# Altium PCB PCB.PcbDoc (part 2 of 3)
Units mm, origin at the board's own origin, x right, y up, seen from the top; angles counter-clockwise.
Board outline 200 x 125 mm, 2 copper layers (Top Layer, Bottom Layer), stack 1.56 mm thick; 156 components, 82 nets, 479 pads, 136 vias.
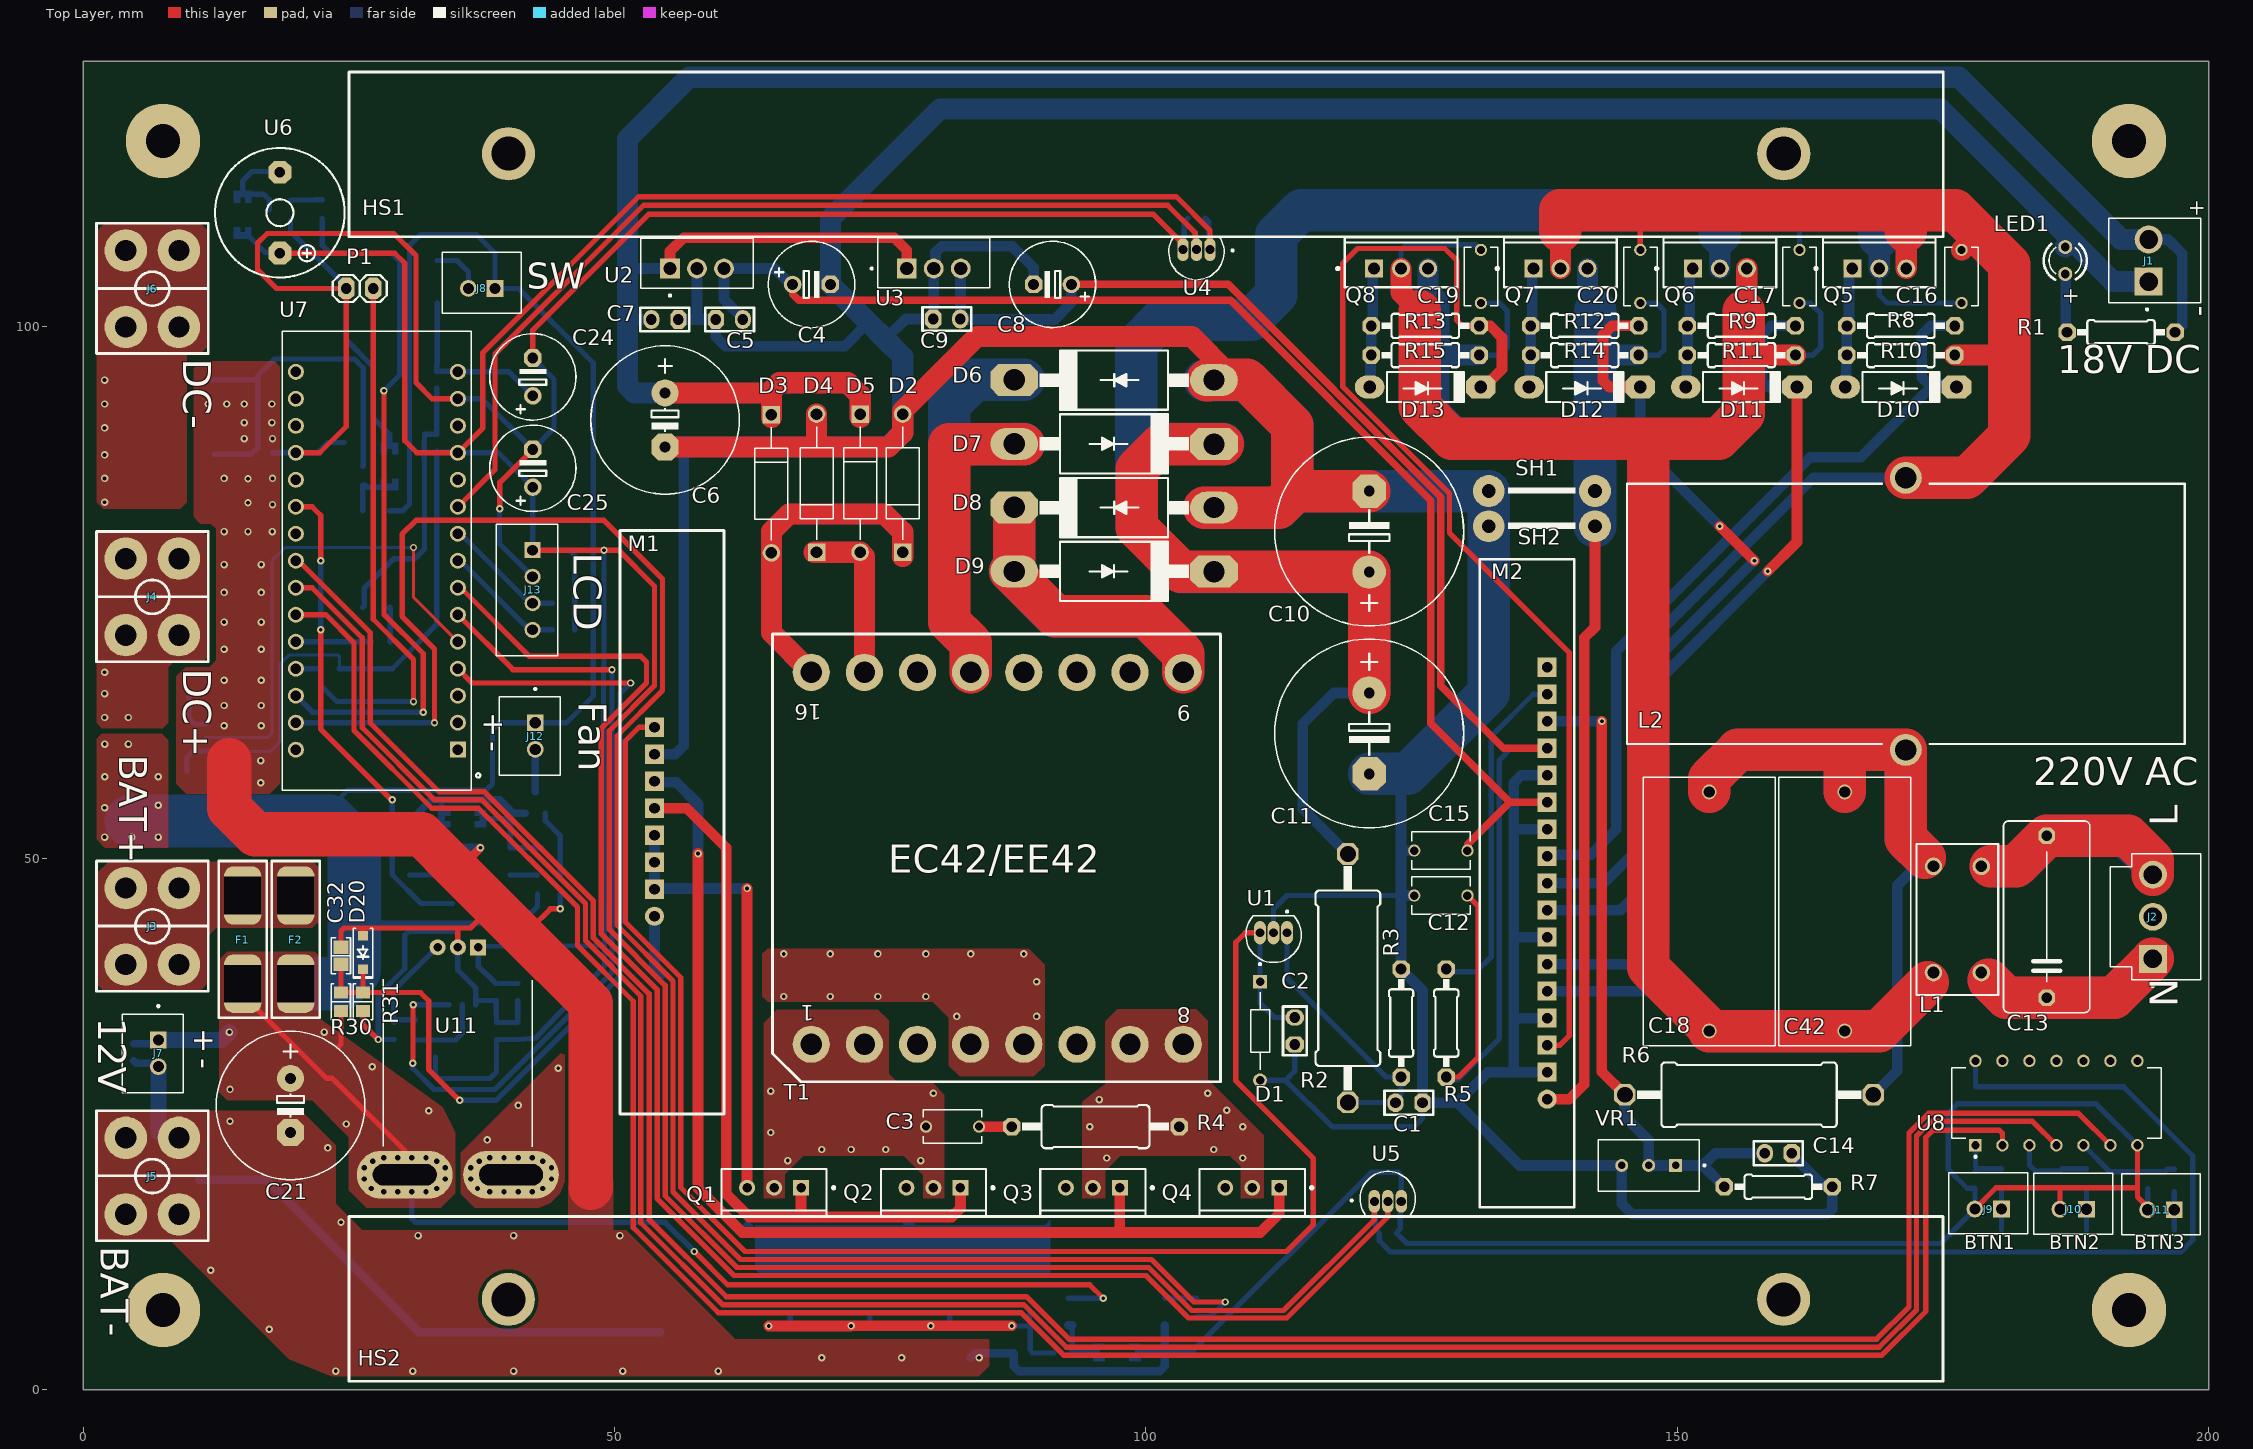
[diagram p0: Top Layer view]

## Part data (continued)
R22 R29: library part RT0805DRD0710KL, "RES SMD 10K OHM 0.5% 1/8W 0805", Device Package="0805 (2012 Metric)", Manufacturer=Yageo, Operating Temperature="-55°C ~ 155°C", Power (Watts)="0.125W, 1/8W", Supplier Device Package=0805, Supplier Part Number 1=311-2699-1-ND, Temperature Coefficient=±25ppm/°C, Tolerance=±0.5%, ComponentLink1Description=Datasheet, ComponentLink1URL=https://www.yageo.com/upload/media/product/productsearch/datasheet/rchip/PYu-RT_1-to-0.01_RoHS_L_11.pdf, ComponentLink2Description="DigiKey Link", ComponentLink2URL=https://www.digikey.com/en/products/detail/yageo/RT0805DRD0710KL/1077814, Composition="Thin Film", Height - Seated (Max)="0.024\" (0.60mm)", id=58, LastUpdated=2023-01-02T20:44:51.957, Lifecycle Status=Active, Minimum Order=1, Number Of Terminations=2, Package / Case="0805 (2012 Metric)", Packaging=TapeAndReel, PartId=27797, Part Number=RT0805DRD0710KL, Part Status=Active, Price=0.03, Resistance="10 kOhms", Series=RT, Size / Dimension="0.079\" L x 0.049\" W (2.00mm x 1.25mm)", Supplier 1=DigiKey
R30: library part RT0805BRD0730KL, "RES SMD 30K OHM 0.1% 1/8W 0805", Device Package="0805 (2012 Metric)", Manufacturer=Yageo, Operating Temperature="-55°C ~ 155°C", Power (Watts)="0.125W, 1/8W", Supplier Device Package=0805, Supplier Part Number 1=YAG1865CT-ND, Temperature Coefficient=±25ppm/°C, Tolerance=±0.1%, ComponentLink1Description=Datasheet, ComponentLink1URL=https://www.yageo.com/upload/media/product/productsearch/datasheet/rchip/PYu-RT_1-to-0.01_RoHS_L_11.pdf, ComponentLink2Description="DigiKey Link", ComponentLink2URL=https://www.digikey.com/en/products/detail/yageo/RT0805BRD0730KL/1075808, Composition="Thin Film", Height - Seated (Max)="0.024\" (0.60mm)", id=4497, LastUpdated=2023-01-02T20:44:13.950, Lifecycle Status=Active, Minimum Order=1, Number Of Terminations=2, Package / Case="0805 (2012 Metric)", Packaging=TapeAndReel, PartId=36699, Part Number=RT0805BRD0730KL, Part Status=Active, Price=0.04, Resistance="30 kOhms", Series=RT, Size / Dimension="0.079\" L x 0.049\" W (2.00mm x 1.25mm)", Supplier 1=DigiKey
R31: library part RT0805BRD077K5L, "RES SMD 7.5K OHM 0.1% 1/8W 0805", Device Package="0805 (2012 Metric)", Manufacturer=Yageo, Operating Temperature="-55°C ~ 155°C", Power (Watts)="0.125W, 1/8W", Supplier Device Package=0805, Supplier Part Number 1=YAG1974CT-ND, Temperature Coefficient=±25ppm/°C, Tolerance=±0.1%, ComponentLink1Description=Datasheet, ComponentLink1URL=https://www.yageo.com/upload/media/product/productsearch/datasheet/rchip/PYu-RT_1-to-0.01_RoHS_L_11.pdf, ComponentLink2Description="DigiKey Link", ComponentLink2URL=https://www.digikey.com/en/products/detail/yageo/RT0805BRD077K5L/1076048, Composition="Thin Film", Height - Seated (Max)="0.024\" (0.60mm)", id=2995, LastUpdated=2023-01-02T20:44:27.430, Lifecycle Status=Active, Minimum Order=1, Number Of Terminations=2, Package / Case="0805 (2012 Metric)", Packaging=TapeAndReel, PartId=33662, Part Number=RT0805BRD077K5L, Part Status=Active, Price=0.04, Resistance="7.5 kOhms", Series=RT, Size / Dimension="0.079\" L x 0.049\" W (2.00mm x 1.25mm)", Supplier 1=DigiKey
R32: library part RT0805DRD07120RL, "RES SMD 120 OHM 0.5% 1/8W 0805", Device Package="0805 (2012 Metric)", Manufacturer=Yageo, Operating Temperature="-55°C ~ 155°C", Power (Watts)="0.125W, 1/8W", Supplier Device Package=0805, Supplier Part Number 1=13-RT0805DRD07120RLCT-ND, Temperature Coefficient=±25ppm/°C, Tolerance=±0.5%, ComponentLink1Description=Datasheet, ComponentLink1URL=https://www.yageo.com/upload/media/product/app/datasheet/rchip/pyu-rt_1-to-0.01_rohs_l.pdf, ComponentLink2Description="DigiKey Link", ComponentLink2URL=https://www.digikey.com/en/products/detail/yageo/RT0805DRD07120RL/1077835, Composition="Thin Film", Height - Seated (Max)="0.024\" (0.60mm)", id=19472, LastUpdated=2024-07-25T09:20:02.283, Lifecycle Status=Active, Minimum Order=1, Number Of Terminations=2, Package / Case="0805 (2012 Metric)", Packaging=TapeAndReel, PartId=88052, Part Number=RT0805DRD07120RL, Price=0.02, Resistance="120 Ohms", Series=RT, Size / Dimension="0.079\" L x 0.049\" W (2.00mm x 1.25mm)", Supplier 1=DigiKey
SH1 SH2: library part "Wire Shunt", "Constantan resistance sampling resistor 20mR. 1 mm dia, 10 mm leg"
T1: library part EC42-20, "Dual 12V To 0-220V-380V 18V 800W EC42-20 Horizontal. 43x43x15mm (L*W*H). 15KHz-50KHz", Input Voltage=12V, Insulation Test Voltage="3600V (AC)", Operating Temperature Max=125°C, Operating Temperature Min=-40°C, Output Current=2A, Output Voltage="18V, 220V, 380V", Switching Frequency=15-50kHz, Case/Size Code=EC42/EE42, Category="Transformers For AC-AC Converter", ComponentLink1Description="Website Link", ComponentLink1URL=https://www.we-online.com/redexpert/article/750310660?ad, ComponentLink2Description="Datasheet Link", ComponentLink2URL=https://www.we-online.com/redexpert/spec/750310660?ad, Mount="Through Hole", Packaging=Tray
U1: "Pwr Sply Func, Voltage Reference, Shunt, TO-92, VS 36V, IS 1 to 100mA, PD 0.7W", Package="TO-92-3 ON Semiconductor", Check_prices=https://www.snapeda.com/parts/TL431ILPG/Onsemi/view-part/?ref=eda, MF="ON Semiconductor", MP=TL431ILPG, SnapEDA_Link=https://www.snapeda.com/parts/TL431ILPG/Onsemi/view-part/?ref=snap
U2: library part LM7812CT/NOPB, "1.5-A, 30-V, linear voltage regulator", Package="TO-220-3 Texas Instruments", Check_prices=https://www.snapeda.com/parts/LM7812CT/NOPB/Texas+Instruments/view-part/?ref=eda, MF="Texas Instruments", MP=LM7812CT/NOPB, SnapEDA_Link=https://www.snapeda.com/parts/LM7812CT/NOPB/Texas+Instruments/view-part/?ref=snap
U3: library part LM7805CT/NOPB, "Linear Voltage Regulator IC Positive Fixed 1 Output 1.5A TO-220-3", Package="TO-220-3 ON Semiconductor", Availability="In Stock", Check_prices=https://www.snapeda.com/parts/LM7805CT/Onsemi/view-part/?ref=eda, MF="ON Semiconductor", MP=LM7805CT, Price=None, Purchase-URL=https://pricing.snapeda.com/search/part/LM7805CT/?ref=eda, SnapEDA_Link=https://www.snapeda.com/parts/LM7805CT/Onsemi/view-part/?ref=snap
U4 U5: "TEMP SENSOR, Â± 0.4Â°C; IC Output Type:Voltage; Sensing Accuracy Range:Â± 0.4Â°C; Sensing Temperature Min:+2Â°C; Sensing Temperature Max:+100Â°C; Sensor Case Style:TO-92; No. of Pins:3Pins; Supply Voltage Min:4V; Supply Voltage Max:30V; Product Range:LM35", Package="TO-92 Texas Instruments", Check_prices=https://www.snapeda.com/parts/LM35DZNOPB/Texas+Instruments/view-part/?ref=eda, MF="Texas Instruments", MP=LM35DZNOPB, SnapEDA_Link=https://www.snapeda.com/parts/LM35DZNOPB/Texas+Instruments/view-part/?ref=snap
U6: library part Buzzer, "5-12v small buzzer (12mm)", ASiD Part Number="Buzzer small-AS"
U7: library part ARDUINO_NANO_A000005, "ATSAMD21G18A Arduino Nano 33 IoT series ARMÂ® CortexÂ®-M0+ MCU 32-Bit Embedded Evaluation Board", Package="Non-Standard Arduino", Check_prices=https://www.snapeda.com/parts/ARDUINO%20NANO%20A000005/Arduino/view-part/?ref=eda, MF=Arduino, MP="ARDUINO NANO A000005", SnapEDA_Link=https://www.snapeda.com/parts/ARDUINO%20NANO%20A000005/Arduino/view-part/?ref=snap
U8: "6-ch, 2-V to 6-V inverters with Schmitt-Trigger inputs", Package="PDIP-14 Texas Instruments", Check_prices=https://www.snapeda.com/parts/CD74HC14E/Texas+Instruments/view-part/?ref=eda, MF="Texas Instruments", MP=CD74HC14E, SnapEDA_Link=https://www.snapeda.com/parts/CD74HC14E/Texas+Instruments/view-part/?ref=snap
U9: "Dual, Low-Noise, Rail-To-Rail Operational Amplifier 8-SOIC -40 to 125", Package="SOIC-8 Texas Instruments", Check_prices=https://www.snapeda.com/parts/TLC2272QDR/Texas+Instruments/view-part/?ref=eda, MF="Texas Instruments", MP=TLC2272QDR, SnapEDA_Link=https://www.snapeda.com/parts/TLC2272QDR/Texas+Instruments/view-part/?ref=snap
U10: "Current Sensor 30A 1 Channel Hall Effect, Open Loop Bidirectional 8-SOIC (0.154, 3.90mm Width)", Package="SOIC-8 Allegro MicroSystems LLC", Availability="In Stock", Check_prices=https://www.snapeda.com/parts/ACS712ELCTR-30A-T/Allegro+Industries/view-part/?ref=eda, MF=Allegro, MP=ACS712ELCTR-30A-T, Price=None, Purchase-URL=https://pricing.snapeda.com/search/part/ACS712ELCTR-30A-T/?ref=eda, SnapEDA_Link=https://www.snapeda.com/parts/ACS712ELCTR-30A-T/Allegro+Industries/view-part/?ref=snap
U11: "Current Sensor 150A 1 Channel Hall Effect, Open Loop Unidirectional 5-CB Formed Leads, PFF", Package="5-CB-5 Allegro MicroSystems LLC", Check_prices=https://www.snapeda.com/parts/ACS758/Allegro/view-part/?ref=eda, MF="Allegro MicroSystems", MP=ACS758, SnapEDA_Link=https://www.snapeda.com/parts/ACS758/Allegro/view-part/?ref=snap
VR1: library part 3296W-1-502, "NON-RoHS, 3/8 Sq, Thru-Hole, TRIMMER, 5 Kohms, Cermet, 25 Turns, Pwr-Rtg 0.5W", Package="NON STANDARD-3 Bourns", Check_prices=https://www.snapeda.com/parts/3296W-1-502/Bourns/view-part/?ref=eda, MF=Bourns, MP=3296W-1-502, SnapEDA_Link=https://www.snapeda.com/parts/3296W-1-502/Bourns/view-part/?ref=snap

## Free pads (board coordinates)
  round 7 hole 3.2: 9(7.5,7.5) 9(7.5,117.5) 9(192.5,7.5) 9(192.5,117.5)

## Via types
v1: diameter 0.7, hole 0.35, Top Layer to Bottom Layer, 78 vias
v2: diameter 0.7, hole 0.35, Top Layer to Bottom Layer, tented both sides, 55 vias
v3: diameter 0.7, hole 0.35, Top Layer to Bottom Layer, tented top, 3 vias

## Nets (pads, with @x,y where several pads share a name; then routed paths per layer and width w, separated by ;. In a path a pad name is that pad's centre, name@x,y a point inside that pad or via, vN(x,y) a via of type N, cw(c..) or ccw(c..) an arc to the next point about the centre after c; other vN are vias at no path point)
18VAC+: D2.C D3.A T1.16 | length 61.7
  Top Layer w2: T1.16@68.5,67.5 64.75,71.25 D3.A@64.75,78.75 64.75,80.75 66.4,82.4 75.4,82.4 77.1,80.7 D2.C@77.1,78.8 D2.C@77.1,78.4
  Bottom Layer w2: T1.16@68.5,67.5 64.75,71.25 D3.A@64.75,78.75 64.75,80.75 66.4,82.4 75.4,82.4 77.1,80.7 D2.C@77.1,78.8 D2.C@77.1,78.4
18VAC-: D4.C D5.A T1.15 | length 31.6
  Top Layer w2: D4.C@68.75,78.8 D4.C@69,78.8 D5.A@73.1,78.8 73.5,78.4 T1.15@73.5,67.5
  Bottom Layer w2: D4.C@68.75,78.8 D4.C@69,78.8 D5.A@73.1,78.8 73.5,78.4 T1.15@73.5,67.5